# EAGLE board shield2 (EAGLE 7.6.0)

Size 65 x 56.5 mm. Coordinates in mm from the lower left corner, seen from the top.
Outline: 0,0 65,0 65,56.5 0,56.5 0,0
Copper layers (1*16): Top 0.035mm / dielectric 1.5mm / Bottom 0.035mm
Design rules "default": minimum track width 10mil, minimum drill 24mil, track to track 8mil, track to pad 8mil, pad to pad 8mil, via to via 8mil, smd to smd 8mil, copper to edge 40mil, drill to drill 8mil, minimum pad ring 10mil, minimum via ring 8mil, stop-mask expansion 4mil, vias tented up to drill 0mil, thermal gap 10mil

## Footprints (pad centres in the part's own frame; a part is rotated, then mirrored left to right if it is on the bottom)
LGA8 = smd 1.2 x 0.5: 1 -1.2,1.875; 2 -1.2,0.625; 3 -1.2,-0.625; 4 -1.2,-1.875; 5 1.2,-1.875; 6 1.2,-0.625; 7 1.2,0.625; 8 1.2,1.875
C1206 = smd 1.6 x 1.8: 1 -1.4,0; 2 1.4,0
153CLV-0605 = smd 3.5 x 1.6: + 2.7,0; - -2.7,0
153CLV-1012 = smd 4.3 x 2.5: + 4.15,0; - -4.15,0
153CLV-0405 = smd 2.6 x 1.6: + 1.8,0; - -1.8,0
DO-214AC = smd 1.8 x 2.4: A 2.025,0; C -2.025,0
TO263-5 = smd 1 x 3: 1 -3.4,-8; 2 -1.7,-8; 3 0,-8; 4 1.7,-8; 5 3.4,-8 | smd 11 x 8: TAB 0,3.175
SOT223 = smd 1.5 x 2: 1 -2.3,-3.15; 2 0,-3.15; 3 2.3,-3.15 | smd 3.8 x 2: 4 0,3.15
LEAD-QFN24 = smd 0.6 x 0.2: 1 -1.6,1; 2 -1.6,0.6; 3 -1.6,0.2; 4 -1.6,-0.2; 5 -1.6,-0.6; 6 -1.6,-1; 13 1.6,-1; 14 1.6,-0.6; 15 1.6,-0.2; 16 1.6,0.2; 17 1.6,0.6; 18 1.6,1 | smd 0.2 x 0.6: 7 -1,-1.6; 8 -0.6,-1.6; 9 -0.2,-1.6; 10 0.2,-1.6; 11 0.6,-1.6; 12 1,-1.6; 19 1,1.6; 20 0.6,1.6; 21 0.2,1.6; 22 -0.2,1.6; 23 -0.6,1.6; 24 -1,1.6 | smd 1.7 x 1.54: 25 0,0
SMA-EDGE = smd 1.524 x 4.064: GND@0 0,0; GND@1 5.08,0; SIG 2.54,0 | smd 1.524 x 4.064 bottom: GND@2 0,0; GND@3 5.08,0
SRR1210 = smd 5.6 x 3.1: 1 0,5.05; 2 0,-5.05
L2012C = smd 1 x 1: 1 -1,0; 2 1,0
1206 = smd 1.6 x 1.803: A -1.422,0; C 1.422,0
TSSOP28 = smd 0.305 x 0.991: 1 -4.225,-2.918; 2 -3.575,-2.918; 3 -2.925,-2.918; 4 -2.275,-2.918; 5 -1.625,-2.918; 6 -0.975,-2.918; 7 -0.325,-2.918; 8 0.325,-2.918; 9 0.975,-2.918; 10 1.625,-2.918; 11 2.275,-2.918; 12 2.925,-2.918; 13 3.575,-2.918; 14 4.225,-2.918; 15 4.225,2.918; 16 3.575,2.918; 17 2.925,2.918; 18 2.275,2.918; 19 1.625,2.918; 20 0.975,2.918; 21 0.325,2.918; 22 -0.325,2.918; 23 -0.975,2.918; 24 -1.625,2.918; 25 -2.275,2.918; 26 -2.925,2.918; 27 -3.575,2.918; 28 -4.225,2.918
R1206 = smd 1.6 x 1.803: 1 -1.422,0; 2 1.422,0
MA20-2 = drill 1.016 octagon: 1 -24.13,-1.27; 2 -24.13,1.27; 3 -21.59,-1.27; 4 -21.59,1.27; 5 -19.05,-1.27; 6 -19.05,1.27; 7 -16.51,-1.27; 8 -16.51,1.27; 9 -13.97,-1.27; 10 -13.97,1.27; 11 -11.43,-1.27; 12 -11.43,1.27; 13 -8.89,-1.27; 14 -8.89,1.27; 15 -6.35,-1.27; 16 -6.35,1.27; 17 -3.81,-1.27; 18 -3.81,1.27; 19 -1.27,-1.27; 20 -1.27,1.27; 21 1.27,-1.27; 22 1.27,1.27; 23 3.81,-1.27; 24 3.81,1.27; 25 6.35,-1.27; 26 6.35,1.27; 27 8.89,-1.27; 28 8.89,1.27; 29 11.43,-1.27; 30 11.43,1.27; 31 13.97,-1.27; 32 13.97,1.27; 33 16.51,-1.27; 34 16.51,1.27; 35 19.05,-1.27; 36 19.05,1.27; 37 21.59,-1.27; 38 21.59,1.27; 39 24.13,-1.27; 40 24.13,1.27
MA04-2 = drill 1.016 octagon: 1 -3.81,-1.27; 2 -3.81,1.27; 3 -1.27,-1.27; 4 -1.27,1.27; 5 1.27,-1.27; 6 1.27,1.27; 7 3.81,-1.27; 8 3.81,1.27
MA03-1 = drill 1.016 long: 1 -2.54,0; 2 0,0; 3 2.54,0
MSOP10_0.5 = smd 0.3 x 1.02: 1 -1,-2.4; 2 -0.5,-2.4; 3 0,-2.4; 4 0.5,-2.4; 5 1,-2.4; 6 1,2.4; 7 0.5,2.4; 8 0,2.4; 9 -0.5,2.4; 10 -1,2.4
2,8 = hole 2.8: 0,0
NE0-6M = smd 1.6 x 0.8: 1 -6.1,14; 2 -6.1,12.9; 3 -6.1,11.8; 4 -6.1,10.7; 5 -6.1,9.6; 6 -6.1,8.5; 7 -6.1,7.4; 8 -6.1,4.4; 9 -6.1,3.3; 10 -6.1,2.2; 11 -6.1,1.1; 12 -6.1,0; 13 6.1,0; 14 6.1,1.1; 15 6.1,2.2; 16 6.1,3.3; 17 6.1,4.4; 18 6.1,7.4; 19 6.1,8.5; 20 6.1,9.6; 21 6.1,10.7; 22 6.1,11.8; 23 6.1,12.9; 24 6.1,14

## Placement (x,y rotation side)
ALT  MPL3115A2LGA8  [LGA8]  16.33,39.88 0 top
C1  0.1uF  [C1206]  26.63,35.88 0 top
C2  0.1uF  [C1206]  50.78,47.38 0 top
C3  0.1uF  [C1206]  30.93,40.88 0 top
C4  10uF  [C1206]  34.49,47.5 0 top
C5  0.1uF  [C1206]  8.08,26.88 0 top
C6  100uF  [153CLV-0605]  42.48,18.86 0 top
C7  1000uF  [153CLV-1012]  7.25,18.62 0 top
C8  100uF  [153CLV-0605]  52.32,18.86 0 top
C9  1000uF  [153CLV-1012]  32.78,11.12 0 top
C10  0.1uF  [C1206]  43,39.5 90 top
C11  10uF  [153CLV-0405]  -20.5,-12.5 0 top  (outside the outline)
C12  0.1uF  [C1206]  -21,-20.5 0 top  (outside the outline)
D1  1N5822  [DO-214AC]  8.12,32.22 0 top
IC1  [TO263-5]  19.95,11.16 0 top
IC2  AMS1117-3.3  [SOT223]  47.21,8.22 0 top
IMU  MPU-9250  [LEAD-QFN24]  23.48,40.38 0 top
J$1  SMA_EDGE  [SMA-EDGE]  51.5,2 0 top
L1  SRR1210  [SRR1210]  21.18,27.4 0 top
L2  [L2012C]  -21,-38 0 top  (outside the outline)
LED1  [1206]  -12.5,-10 0 top  (outside the outline)
PWM  [TSSOP28]  51.62,41.72 270 bottom
R1  4k7  [R1206]  27.41,45.5 0 top
R2  4k7  [R1206]  20.83,46.5 0 top
R3  10k  [R1206]  41.75,46 0 top
R4  3k  [R1206]  55.17,9 0 top
R5  1k  [R1206]  31.59,20.5 0 top
R6  1k  [R1206]  -12.5,-3.5 0 top  (outside the outline)
R7  1k  [R1206]  -12.5,-14 0 top  (outside the outline)
R8  22R  [R1206]  -21,-31.5 0 top  (outside the outline)
RPI  [MA20-2]  32.13,52.33 0 top
SV1  [MA04-2]  4.01,41.45 90 top
SV2  MOTOR0  [MA03-1]  60.5,46 0 top
SV3  MOTOR1  [MA03-1]  60.5,41.5 0 top
SV4  MOTOR2  [MA03-1]  60.5,37 0 top
SV5  MOTOR3  [MA03-1]  60.5,32.5 0 top
SV6  MOTOR4  [MA03-1]  60.5,28 0 top
SV7  MOTOR5  [MA03-1]  60.5,23.5 0 top
SV8  MOTOR6  [MA03-1]  60.5,19 0 top
SV9  MOTOR7  [MA03-1]  60.5,14.5 0 top
SV10  DISTANCE  [MA03-1]  32.5,27 0 top
U$1  ADS1015IDGT  [MSOP10_0.5]  38,40.5 0 bottom
U$2  [2,8]  3.5,3.5 0 top
U$3  [2,8]  3.5,53 0 top
U$4  [2,8]  61.5,53 0 top
U$5  [2,8]  61.5,3.5 0 top
U$6  BLOX-NEO-6M  [NE0-6M]  53,29.5 90 top

## Library data of the parts
ALT = SparkFun-Sensors; PROD_ID: IC-10869
C1-C12 L2 = rcl
D1 = diode
IC1 = AWJLEagleLib
IC2 = v-reg
IMU = invensense
J$1 = SparkFun-Connectors
L1 = inductor-bourns
LED1 = led
PWM = adafruit
R1-R8 = resistor
RPI SV1-SV10 = con-lstb; OC_FARNELL: unknown; OC_NEWARK: unknown
U$1 = bt_adc
U$2-U$5 = holes
U$6 = microduino

## Nets
+3V3: ALT.1 ALT.4 C1.1 C3.2 C4.2 C9.+ C10.2 C11.+ C12.1 IC2.4 IMU.13 PWM.28 R1.1 R2.1 R3.1 R6.1 SV1.2 SV2.2 SV3.2 SV4.2 SV5.2 SV6.2 SV7.2 SV8.2 SV9.2 U$1.8 U$6.23
+5V: C7.+ C8.+ IC1.4 IC2.3 L1.2 SV10.2
+12V: C6.+ IC1.1 R4.1
GND: ALT.3 C1.2 C2.1 C3.1 C4.1 C5.1 C6.- C7.- C8.- C9.- C10.1 C11.- C12.2 D1.C IC1.3 IC1.5 IC1.TAB IC2.1 IMU.18 PWM.1 PWM.2 PWM.3 PWM.4 PWM.5 PWM.14 PWM.24 PWM.25 R5.1 R7.2 SV1.1 SV2.3 SV3.3 SV4.3 SV5.3 SV6.3 SV7.3 SV8.3 SV9.3 SV10.1 U$1.1 U$1.3 U$6.7 U$6.10 U$6.12 U$6.13 U$6.15 U$6.24
N$1: C2.2 IMU.10
N$2: PWM.23 R3.2
N$3: ALT.2 C5.2
N$4: R4.2 R5.2 U$1.4
N$5: SV10.3 U$1.5
N$6: U$1.6
N$7: D1.A IC1.2 L1.1
N$8: LED1.A R6.2
N$9: U$1.2
N$10: LED1.C U$6.3
N$11: R7.1 U$6.14
N$13: R8.2 U$6.8 U$6.9
N$14: L2.2 R8.1
N$15: J$1.SIG L2.1 U$6.11
PWM0: PWM.6 SV2.1
PWM1: PWM.7 SV3.1
PWM2: PWM.8 SV4.1
PWM3: PWM.9 SV5.1
PWM4: PWM.10 SV6.1
PWM5: PWM.11 SV7.1
PWM6: PWM.12 SV8.1
PWM7: PWM.13 SV9.1
PWM8: PWM.15
PWM9: PWM.16
PWM10: PWM.17
PWM11: PWM.18
PWM12: PWM.19
PWM13: PWM.20
PWM14: PWM.21
PWM15: PWM.22
RPI2: RPI.2
RPI3: ALT.7 IMU.24 PWM.27 R1.2 RPI.3 U$1.9
RPI5: ALT.8 IMU.23 PWM.26 R2.2 RPI.5 U$1.10
RPI8: RPI.8 U$6.21
RPI9: RPI.9
RPI10: RPI.10 U$6.20
RPI19: RPI.19
RPI21: RPI.21
RPI23: RPI.23
RPI24: RPI.24
RPI26: RPI.26

## Tracks (layer width: path | path; a pad name or v marks a point on that pad's centre or on a via)
+3V3  (26 unrouted)
+5V  (5 unrouted)
+12V  (2 unrouted)
GND  (46 unrouted)
N$1  (1 unrouted)
N$2  (1 unrouted)
N$3  (1 unrouted)
N$4  (2 unrouted)
N$5  (1 unrouted)
N$7  (2 unrouted)
N$8  (1 unrouted)
N$10  (1 unrouted)
N$11  (1 unrouted)
N$13  (2 unrouted)
N$14  (1 unrouted)
N$15  (2 unrouted)
PWM0  (1 unrouted)
PWM1  (1 unrouted)
PWM2  (1 unrouted)
PWM3  (1 unrouted)
PWM4  (1 unrouted)
PWM5  (1 unrouted)
PWM6  (1 unrouted)
PWM7  (1 unrouted)
RPI3  (5 unrouted)
RPI5  (5 unrouted)
RPI8  (1 unrouted)
RPI10  (1 unrouted)